# EAGLE board PGTNXEN_pitch_out (EAGLE 8.5.2)
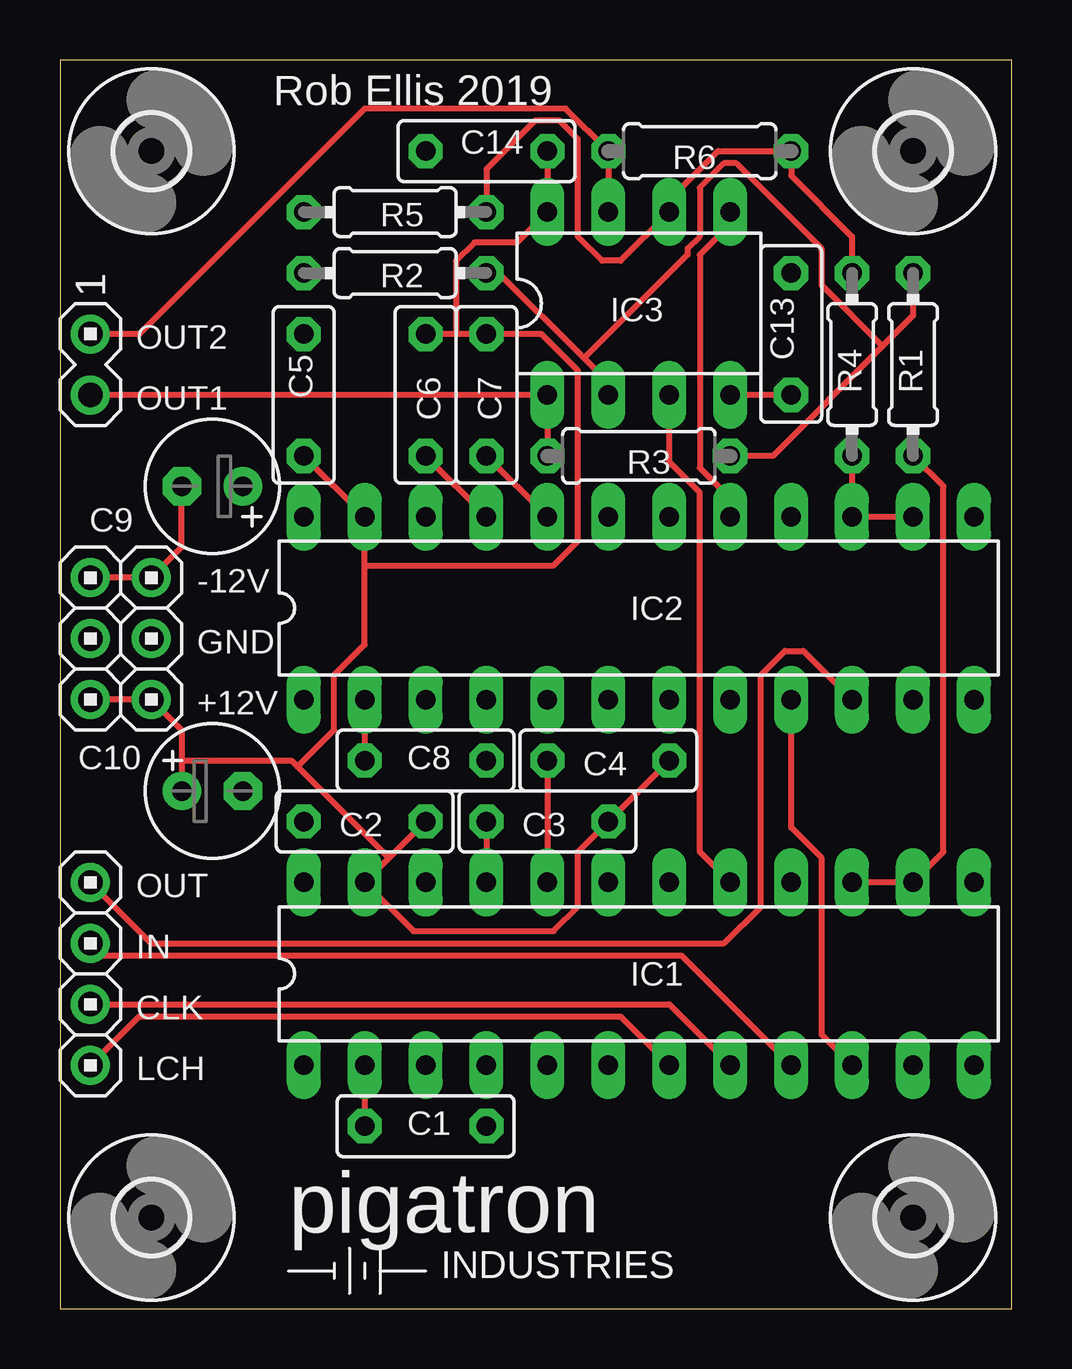
[diagram p0: board, top side]
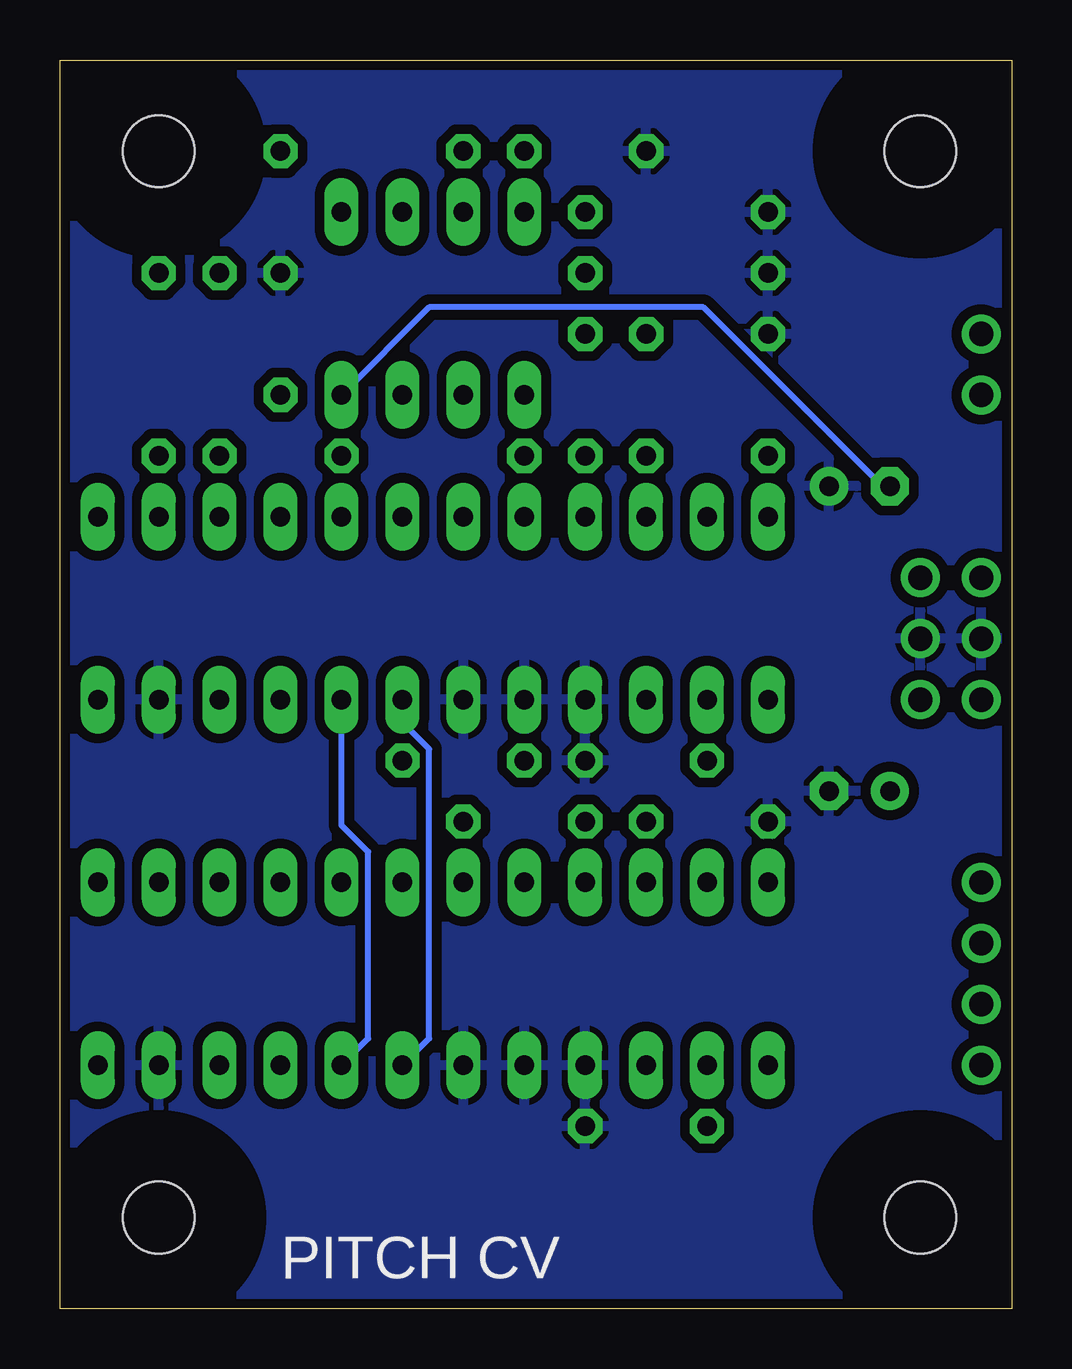
[diagram p1: board, bottom side, seen from below]

Size 39.67 x 52.06 mm. Coordinates in mm from the lower left corner, seen from the top.
Outline: 0,0 39.67,0 39.67,52.06 0,52.06 0,0
Copper layers (1*16): Top 0.0356mm / dielectric 1.5011mm / Bottom 0.0356mm
Design rules "rob": minimum track width 10mil, minimum drill 13mil, track to track 10mil, track to pad 10mil, pad to pad 10mil, via to via 10mil, smd to smd 6mil, copper to edge 15mil, drill to drill 10mil, minimum pad ring 12mil, minimum via ring 10mil, stop-mask expansion 4mil, vias tented up to drill 0mil, thermal gap 10mil

## Footprints (pad centres in the part's own frame; a part is rotated, then mirrored left to right if it is on the bottom)
HEADER/MALE/01 = drill 1.016: 1 0,0
CERAMICDISC/5 = drill 0.813 octagon: 1 -2.54,0; 2 2.54,0
E2,5-6 = drill 0.813 pad 1.6: + -1.27,0 | drill 0.813 pad 1.6 octagon: - 1.27,0
DIL24-3 = drill 0.813 long: 1 -13.97,-3.81; 2 -11.43,-3.81; 3 -8.89,-3.81; 4 -6.35,-3.81; 5 -3.81,-3.81; 6 -1.27,-3.81; 7 1.27,-3.81; 8 3.81,-3.81; 9 6.35,-3.81; 10 8.89,-3.81; 11 11.43,-3.81; 12 13.97,-3.81; 13 13.97,3.81; 14 11.43,3.81; 15 8.89,3.81; 16 6.35,3.81; 17 3.81,3.81; 18 1.27,3.81; 19 -1.27,3.81; 20 -3.81,3.81; 21 -6.35,3.81; 22 -8.89,3.81; 23 -11.43,3.81; 24 -13.97,3.81
DIL08 = drill 0.813 long: 1 -3.81,-3.81; 2 -1.27,-3.81; 3 1.27,-3.81; 4 3.81,-3.81; 5 3.81,3.81; 6 1.27,3.81; 7 -1.27,3.81; 8 -3.81,3.81
0204/7 = drill 0.813 octagon: 1 -3.81,0; 2 3.81,0
RESISTOR/7.5 = drill 0.813 octagon: 1 -3.81,0; 2 3.81,0
HEADER/MALE/02-1 = drill 1.016: 1 -2.54,0; 2 0,0
3,0 = hole 3: 0,0

## Placement (x,y rotation side)
+12V  HEADER/MALE/01  [HEADER/MALE/01]  1.27,25.4 0 top
+12V1  HEADER/MALE/01  [HEADER/MALE/01]  3.81,25.4 0 top
-12V  HEADER/MALE/01  [HEADER/MALE/01]  1.27,30.48 0 top
-12V1  HEADER/MALE/01  [HEADER/MALE/01]  3.81,30.48 0 top
C1  100nF  [CERAMICDISC/5]  15.24,7.62 0 top
C2  100nF  [CERAMICDISC/5]  12.7,20.32 180 top
C3  10nF  [CERAMICDISC/5]  20.32,20.32 180 top
C4  10nF  [CERAMICDISC/5]  22.86,22.86 180 top
C5  100nF  [CERAMICDISC/5]  10.16,38.1 90 top
C6  10nF  [CERAMICDISC/5]  15.24,38.1 270 top
C7  10nF  [CERAMICDISC/5]  17.78,38.1 270 top
C8  100nF  [CERAMICDISC/5]  15.24,22.86 0 top
C9  [E2,5-6]  6.35,34.29 180 top
C10  [E2,5-6]  6.35,21.59 0 top
C13  [CERAMICDISC/5]  30.48,40.64 270 top
C14  [CERAMICDISC/5]  17.78,48.26 180 top
CLOCK  HEADER/MALE/01  [HEADER/MALE/01]  1.27,12.7 0 top
DIN  HEADER/MALE/01  [HEADER/MALE/01]  1.27,15.24 0 top
DOUT  HEADER/MALE/01  [HEADER/MALE/01]  1.27,17.78 0 top
GND  HEADER/MALE/01  [HEADER/MALE/01]  1.27,27.94 0 top
GND1  HEADER/MALE/01  [HEADER/MALE/01]  3.81,27.94 0 top
IC1  AD420  [DIL24-3]  24.13,13.97 0 top
IC2  AD420  [DIL24-3]  24.13,29.21 0 top
IC3  TL082  [DIL08]  24.13,41.91 0 top
LATCH  HEADER/MALE/01  [HEADER/MALE/01]  1.27,10.16 0 top
R1  10k  [0204/7]  35.56,39.37 270 top
R2  20k  [0204/7]  13.97,43.18 0 top
R3  20k  [RESISTOR/7.5]  24.13,35.56 180 top
R4  10k  [0204/7]  33.02,39.37 270 top
R5  20k  [0204/7]  13.97,45.72 0 top
R6  20k  [RESISTOR/7.5]  26.67,48.26 180 top
SV2  [HEADER/MALE/02-1]  1.27,38.1 270 top
U$1  [3,0]  3.81,48.26 0 top
U$2  [3,0]  3.81,3.81 0 top
U$3  [3,0]  35.56,3.81 0 top
U$4  [3,0]  35.56,48.26 0 top
U$5  [PIGATRON-LOGO]  18.41,3.17 0 top

## Library data of the parts
+12V +12V1 -12V -12V1 CLOCK DIN DOUT GND GND1 LATCH SV2 = connectors
C1-C10 C13 C14 = capacitors
IC1 IC2 = ic-package
IC3 = linear
R1 R2 R4 R5 = rcl
R3 R6 = resistors
U$1-U$5 = mechanical

## Nets
-12V: -12V1.1 -12V.1 C9.- C13.2 IC3.4
GND: C1.2 C2.2 C5.2 C8.2 C9.+ C10.- C13.1 C14.2 GND1.1 GND.1 IC1.4 IC1.5 IC1.6 IC1.11 IC2.4 IC2.5 IC2.6 IC2.11 R2.1 R5.1
N$1: IC1.7 IC2.7 LATCH.1
N$2: CLOCK.1 IC1.8 IC2.8
N$3: DIN.1 IC1.9
N$4: IC2.14 IC2.15 R4.2
N$5: DOUT.1 IC2.10
N$6: IC3.2 R1.1 R2.2 R3.1
N$7: +12V1.1 +12V.1 C2.1 C3.1 C4.1 C5.1 C6.1 C7.1 C10.+ C14.1 IC1.23 IC2.23 IC3.8
N$8: C1.1 IC1.2
N$9: C3.2 IC1.21
N$10: C4.2 IC1.20
N$11: IC1.17 IC3.3
N$12: IC1.14 IC1.15 R1.2
N$13: IC3.1 R3.2 SV2.2
N$15: IC1.10 IC2.9
N$16: IC2.17 IC3.5
N$17: IC3.7 R6.2 SV2.1
N$19: C8.1 IC2.2
N$20: C6.2 IC2.21
N$21: C7.2 IC2.20
N$22: IC3.6 R4.1 R5.2 R6.1

## Tracks (layer width: path | path; a pad name or v marks a point on that pad's centre or on a via)
-12V
  Top 0.254: C9.- 5.08,31.75 -12V1.1 -12V.1 | C13.2 IC3.4
  Bottom 0.254: IC3.4 24.29,41.75 12.86,41.75 5.4,34.29 C9.-
GND
  pour Bottom (isolate 0.406): 0,52.07 0,0 40.01,0 40.01,52.07
N$1
  Top 0.254: IC1.7 23.37,12.19 3.3,12.19 LATCH.1
  Bottom 0.254: IC2.7 25.4,24.45 24.29,23.34 24.29,11.27 IC1.7
N$2
  Top 0.254: IC1.8 25.4,12.7 CLOCK.1
  Bottom 0.254: IC2.8 27.94,20.16 26.83,19.05 26.83,11.27 IC1.8
N$3
  Top 0.254: IC1.9 25.91,14.73 1.78,14.73 DIN.1
N$4
  Top 0.254: R4.2 IC2.15 IC2.14
N$5
  Top 0.254: IC2.10 30.99,27.43 30.23,27.43 29.21,26.42 29.21,16.76 27.69,15.24 3.81,15.24 DOUT.1
N$6
  Top 0.254: IC3.2 22.86,38.61 21.84,39.62 | 21.84,39.62 18.29,43.18 R2.2 | R3.1 29.72,35.56 34.29,40.13 | 34.29,40.13 35.56,41.4 R1.1 | 21.84,39.62 26.16,43.94 26.16,44.2 26.67,44.7 26.67,46.74 27.69,47.75 28.19,47.75 31.75,44.2 31.75,42.67 34.29,40.13
N$7
  Top 0.254: 16.51,40.64 C7.1 20.07,40.64 21.59,39.12 21.59,32 20.57,30.99 12.7,30.99 | 16.51,40.64 C6.1 | C14.1 IC3.8 19.05,44.45 17.27,44.45 16.51,43.69 16.51,40.64 | C5.1 IC2.23 12.7,30.99 | C4.1 C3.1 21.59,19.05 21.59,16.76 20.57,15.75 14.73,15.75 IC1.23 13.72,18.8 | C2.1 13.72,18.8 | 5.08,22.86 5.08,24.13 +12V1.1 +12V.1 | 5.08,22.86 C10.+ | 9.91,22.61 9.65,22.86 5.08,22.86 | 9.91,22.61 13.72,18.8 | 12.7,30.99 12.7,27.69 11.43,26.42 11.43,24.13 9.91,22.61
N$8
  Top 0.254: IC1.2 C1.1
N$9
  Top 0.254: C3.2 IC1.21
N$10
  Top 0.254: C4.2 IC1.20
N$11
  Top 0.254: IC3.3 25.4,35.31 26.67,34.04 26.67,19.05 IC1.17
N$12
  Top 0.254: IC1.15 IC1.14 36.83,19.05 36.83,34.29 R1.2
N$13
  Top 0.254: R3.2 IC3.1 SV2.2
N$15
  Top 0.254: IC2.9 30.48,20.07 31.75,18.8 31.75,11.43 IC1.10
N$16
  Top 0.254: IC2.17 27.94,33.78 26.67,35.05 26.67,43.94 27.94,45.21 IC3.5
N$17
  Top 0.254: IC3.7 R6.2 21.08,50.04 12.7,50.04 3.3,40.64 SV2.1
N$19
  Top 0.254: IC2.2 C8.1
N$20
  Top 0.254: C6.2 IC2.21
N$21
  Top 0.254: C7.2 IC2.20
N$22
  Top 0.254: R4.1 33.02,44.7 30.48,47.24 R6.1 27.43,48.26 25.4,46.23 IC3.6 23.37,43.69 22.61,43.69 21.59,44.7 21.59,48.77 20.83,49.53 19.81,49.53 17.78,47.5 R5.2

## Text on the board
tNames: Rob Ellis 2019 | OUT2 | OUT1 | -12V | GND | +12V | OUT | IN | CLK | LCH
bNames: PITCH CV